# EAGLE board rgbstripe_fft_lochraster (EAGLE 9.6.2)
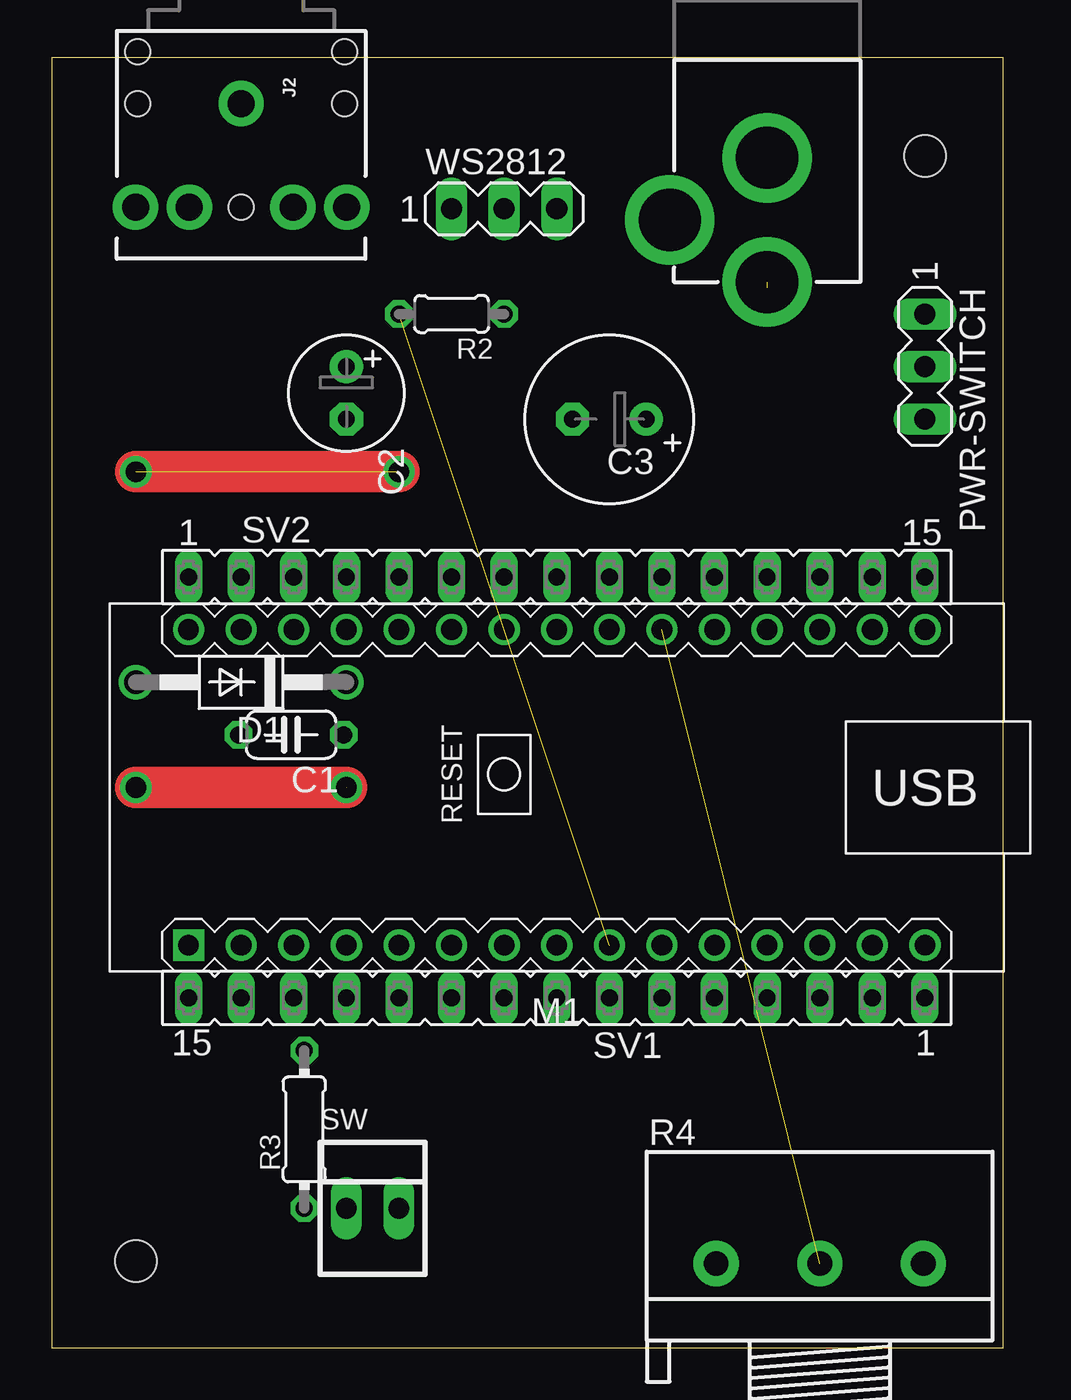
[diagram p0: board, top side]
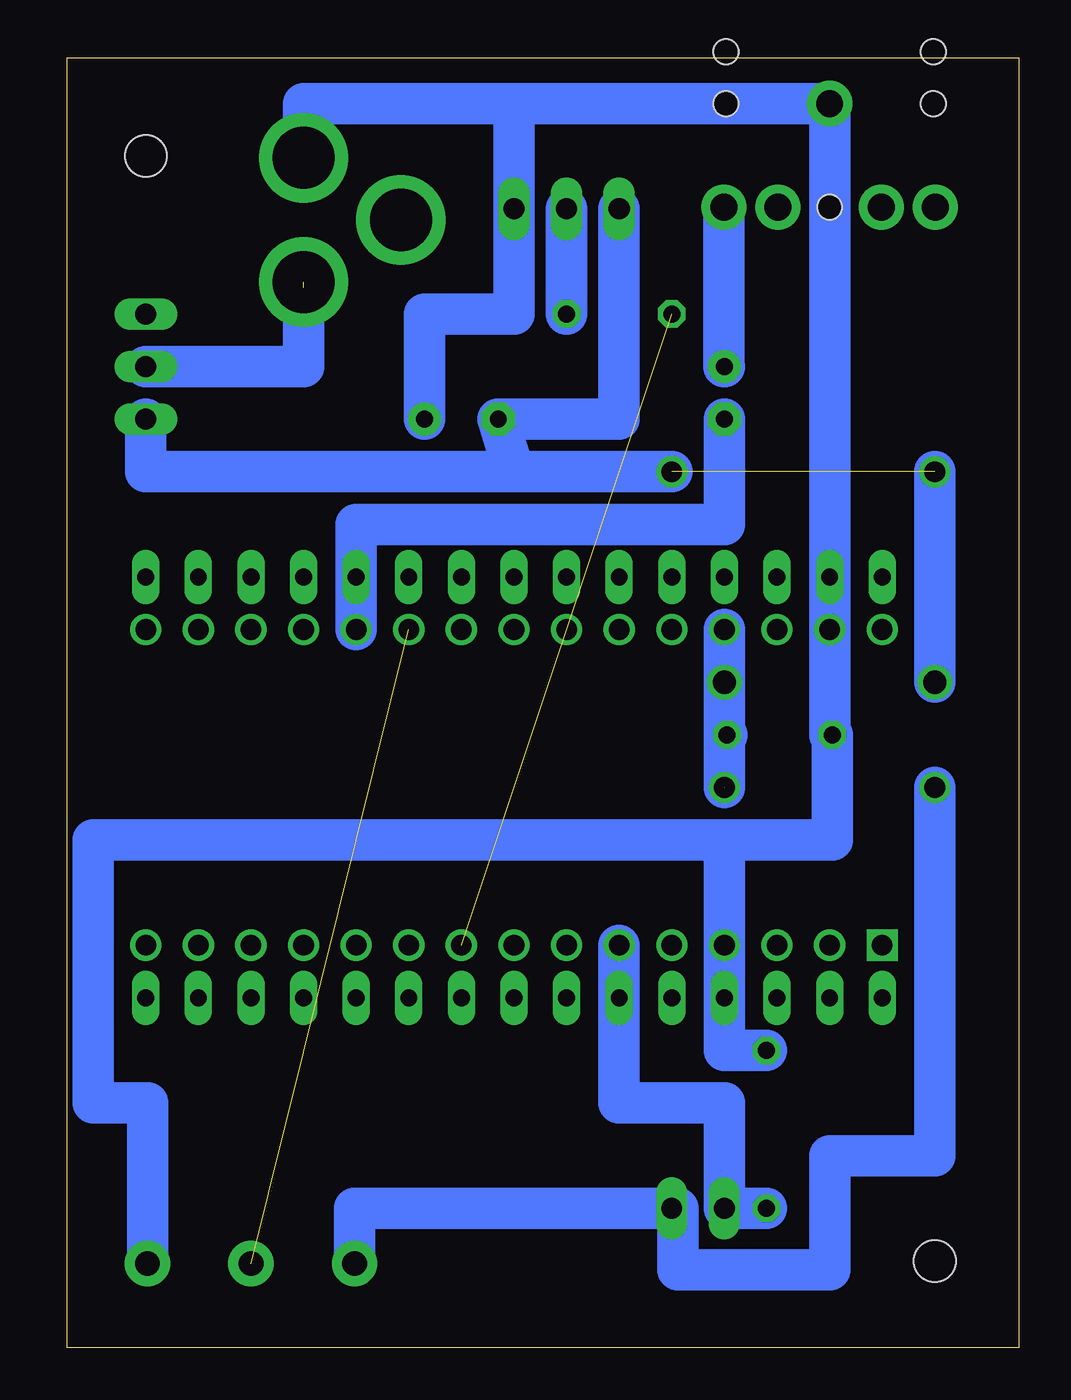
[diagram p1: board, bottom side, seen from below]

Size 45.95 x 62.28 mm. Coordinates in mm from the lower left corner, seen from the top.
Outline: 0,0 45.95,0 45.95,62.28 0,62.28 0,0
Copper layers (1*16): Top 0.035mm / dielectric 1.5mm / Bottom 0.035mm
Design rules "default *": minimum track width 36mil, minimum drill 0.35mm, track to track 10mil, track to pad 10mil, pad to pad 6mil, via to via 6mil, smd to smd 6mil, copper to edge 40mil, drill to drill 6mil, minimum pad ring 10mil, minimum via ring 8mil, stop-mask expansion 4mil, vias tented up to drill 0mil, thermal gap 10mil
Holes 2 mm at 4.06,4.19 42.16,57.53

## Footprints (pad centres in the part's own frame; a part is rotated, then mirrored left to right if it is on the bottom)
C050-024X044 = drill 0.813 octagon: 1 -2.54,0; 2 2.54,0
E2,5-6 = drill 0.813 pad 1.6: + -1.27,0 | drill 0.813 pad 1.6 octagon: - 1.27,0
E3,5-8 = drill 0.813 pad 1.6: + -1.778,0 | drill 0.813 pad 1.6 octagon: - 1.778,0
DO41-10 = drill 1.118: A 5.08,0; C -5.08,0
POWER_JACK_PTH = drill 2.997 pad 4.318: GND 0,7.7; GNDBREAK 4.7,10.7; PWR 0,13.7
AUDIO-JACK-KIT = drill 1.3 pad 2.184: RING 5,5.1; RSH 5,2.5; SLEEVE 0,0; TIP 5,-5.1; TSH 5,-2.5 | hole 1.2: 0,5; -2.5,5; -2.5,-5; 0,-5; 5,0
ARDUINO-NANO-3.0 = drill 1 square: J1.1 17.78,7.62 | drill 1: J1.2 15.24,7.62; J1.3 12.7,7.62; J1.4 10.16,7.62; J1.5 7.62,7.62; J1.6 5.08,7.62; J1.7 2.54,7.62; J1.8 0,7.62; J1.9 -2.54,7.62; J1.10 -5.08,7.62; J1.11 -7.62,7.62; J1.12 -10.16,7.62; J1.13 -12.7,7.62; J1.14 -15.24,7.62; J1.15 -17.78,7.62; J2.1 17.78,-7.62; J2.2 15.24,-7.62; J2.3 12.7,-7.62; J2.4 10.16,-7.62; J2.5 7.62,-7.62; J2.6 5.08,-7.62; J2.7 2.54,-7.62; J2.8 0,-7.62; J2.9 -2.54,-7.62; J2.10 -5.08,-7.62; J2.11 -7.62,-7.62; J2.12 -10.16,-7.62; J2.13 -12.7,-7.62; J2.14 -15.24,-7.62; J2.15 -17.78,-7.62
MA03-1 = drill 1.016 long: 1 -2.54,0; 2 0,0; 3 2.54,0
0204/5 = drill 0.813 octagon: 1 -2.54,0; 2 2.54,0
0204/7 = drill 0.813 octagon: 1 -3.81,0; 2 3.81,0
3RP/1610N = drill 1.2 pad 2.184: 1 -5,0; 2 0,0; 3 5,0
FE15 = drill 0.813 long: 1 -17.78,0; 2 -15.24,0; 3 -12.7,0; 4 -10.16,0; 5 -7.62,0; 6 -5.08,0; 7 -2.54,0; 8 0,0; 9 2.54,0; 10 5.08,0; 11 7.62,0; 12 10.16,0; 13 12.7,0; 14 15.24,0; 15 17.78,0
22-23-2021 = drill 1 long: 1 -1.27,0; 2 1.27,0

## Placement (x,y rotation side)
C1  10nF  [C050-024X044]  11.56,29.59 180 top
C2  10uF  [E2,5-6]  14.22,46.1 270 top
C3  1000uF  [E3,5-8]  26.92,44.83 180 top
D1  1N4004  [DO41-10]  9.14,32.13 180 top
J1  POWER_JACK  [POWER_JACK_PTH]  34.54,65.15 180 top
J2  AUDIO_JACK_3.5MM_KIT  [AUDIO-JACK-KIT]  9.14,60.07 270 top
M1  ARDUINO-NANO-3.0  [ARDUINO-NANO-3.0]  24.38,27.05 180 top
PWR-SWITCH  [MA03-1]  42.16,47.37 270 top
R2  220  [0204/5]  19.3,49.91 180 top
R3  220k  [0204/7]  12.19,10.54 90 top
R4  [3RP/1610N]  37.08,4.06 0 top
SV1  [FE15]  24.38,16.89 180 top
SV2  [FE15]  24.38,37.21 0 top
SW  22-23-2021  [22-23-2021]  15.49,6.73 0 top
WS2812  [MA03-1]  21.84,54.99 0 top

## Library data of the parts
C1-C3 R2 R3 = resistor
D1 = diode
J1 = SparkFun-Connectors; PROD_ID: CONN-08197
J2 = SparkFun-Connectors; PROD_ID: CONN-08774; SF_ID: PRT-08032
M1 = diy-modules-nano
PWR-SWITCH WS2812 = con-lstb; OC_FARNELL: unknown; OC_NEWARK: unknown
R4 = pot
SV1 SV2 = con-lsta; OC_FARNELL: unknown; OC_NEWARK: unknown
SW = con-molex; MF: MOLEX; MPN: 22-23-2021; OC_FARNELL: 1462926; OC_NEWARK: 25C3832

## Nets
3V3: M1.J2.14
GND: C1.2 C3.+ J1.GND J2.SLEEVE M1.J1.4 M1.J2.2 R3.2 R4.3 WS2812.3
N$1: C1.1 D1.C M1.J2.4 R4.1 SW.2
N$3: C2.+ J2.RING
N$6: C2.- M1.J2.11
N$8: M1.J1.5
N$14: M1.J1.9 R2.2
N$15: M1.J2.10 R4.2
N$16: R2.1 WS2812.2
N$17: M1.J1.6 R3.1 SW.1
N$19: J1.PWR PWR-SWITCH.2
VCC: C3.- D1.A PWR-SWITCH.3 WS2812.1
VIN: M1.J2.1

## Tracks (layer width: path | path; a pad name or v marks a point on that pad's centre or on a via)
GND
  Bottom 2: 24.38,60.07 WS2812.3 24.38,49.91 28.7,49.91 C3.+ | 24.38,60.07 J2.SLEEVE M1.J2.2 9.14,29.59 C1.2 9.02,24.51 14.22,24.51 | R4.3 42.08,11.81 44.7,11.81 44.7,24.51 14.22,24.51 | 14.22,24.51 M1.J1.4 14.22,14.35 R3.2 | J1.GND 34.54,60.07 24.38,60.07
N$1  (via drill 1)  (1 unrouted)
  Top 2: v4.06,27.05 14.22,27.05
  Bottom 2: M1.J2.4 D1.C 14.22,29.59 | R4.1 32.08,6.73 SW.2 16.48,6.73 16.48,3.77 9.14,3.77 9.14,9.27 4.06,9.27 v4.06,27.05 | C1.1 14.22,29.59 | 14.22,29.59 14.22,27.05
N$2  (via drill 1)
  Top 2: 16.76,42.29 v4.06,42.29
N$3
  Bottom 2: J2.RING 14.24,47.37 C2.+
N$4  (via drill 1)
  other vias: 14.22,27.05
N$6
  Bottom 2: C2.- 14.22,39.75 32,39.75 M1.J2.11
N$14  (1 unrouted)
N$15  (1 unrouted)
N$16
  Bottom 2: WS2812.2 R2.1
N$17
  Bottom 2: R3.1 SW.1 14.22,11.81 19.3,11.81 M1.J1.6
N$19  (1 unrouted)
  Bottom 2: PWR-SWITCH.2 34.54,47.37 34.54,51.18
VCC  (via drill 1)  (1 unrouted)
  Bottom 2: 24.38,42.29 C3.- 19.3,44.83 WS2812.1 | 24.38,42.29 v16.76,42.29 | PWR-SWITCH.3 42.16,42.29 40.89,42.29 24.38,42.29 | D1.A 4.06,42.29